# EAGLE board tiu_tracking_tag (EAGLE 5.11)
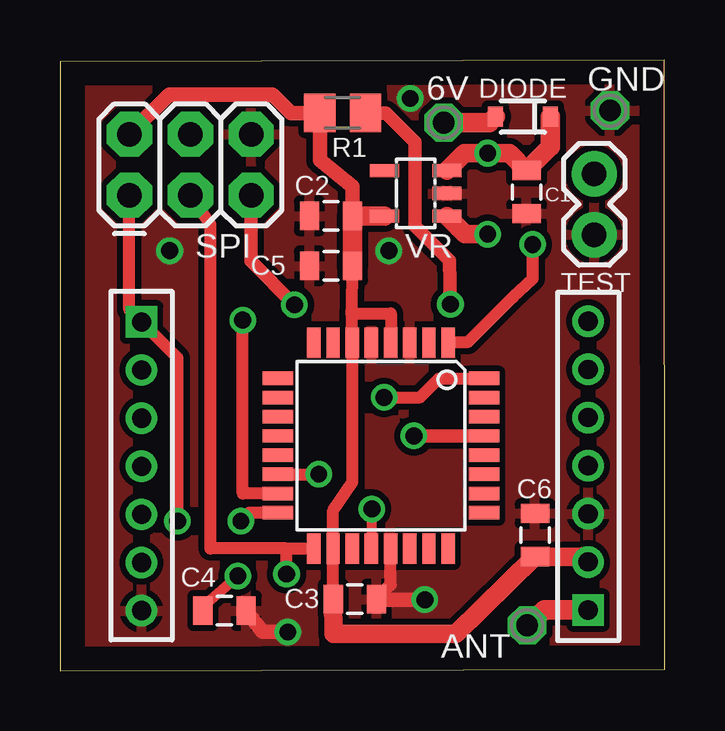
[diagram p0: board, top side]
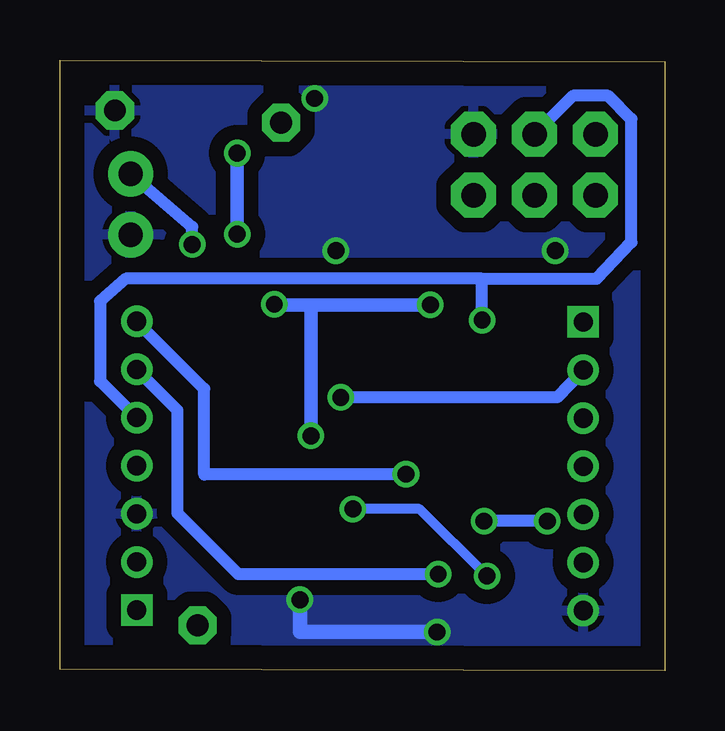
[diagram p1: board, bottom side, seen from below]

Size 25.22 x 25.48 mm. Coordinates in mm from the lower left corner, seen from the top.
Outline: 0,0 25.22,0.08 25.21,25.48 0.01,25.4 0,0
Copper layers (1*16): Top 0.035mm / dielectric 1.5mm / Bottom 0.035mm
Design rules "default": minimum track width 10mil, minimum drill 24mil, track to track 8mil, track to pad 8mil, pad to pad 8mil, via to via 8mil, smd to smd 8mil, copper to edge 40mil, drill to drill 8mil, minimum pad ring 10mil, minimum via ring 8mil, stop-mask expansion 4mil, vias tented up to drill 0mil, thermal gap 10mil
Net classes: 1 power: width 0.381 mm, clearance 0.254 mm

## Footprints (pad centres in the part's own frame; a part is rotated, then mirrored left to right if it is on the bottom)
1,6/0,8 = drill 0.9 pad 1.6 octagon: 1 0,0
0805 = smd 0.8 x 1.2: 1 -0.9,0; 2 0.9,0
SOD-323 = smd 0.63 x 0.83: 1 -1.15,0; 2 1.15,0
1X07 = drill 0.8 square: 1 0,0 | drill 0.8 round: 2 2.007,0; 3 4.013,0; 4 6.02,0; 5 8.026,0; 6 10.033,0; 7 12.04,0
M0805 = smd 1.3 x 1.6: 1 -0.95,0; 2 0.95,0
2X3 = drill 1.016 pad 1.88 octagon: 1 0,0; 2 0,2.54; 3 2.54,0; 4 2.54,2.54; 5 5.08,0; 6 5.08,2.54
1X02 = drill 1.016 pad 1.88 round: 1 0,0; 2 2.54,0
TQFP32-08 = smd 1.27 x 0.559: 1 -4.293,2.8; 2 -4.293,2; 3 -4.293,1.2; 4 -4.293,0.4; 5 -4.293,-0.4; 6 -4.293,-1.2; 7 -4.293,-2; 8 -4.293,-2.8; 17 4.293,-2.8; 18 4.293,-2; 19 4.293,-1.2; 20 4.293,-0.4; 21 4.293,0.4; 22 4.293,1.2; 23 4.293,2; 24 4.293,2.8 | smd 0.559 x 1.27: 9 -2.8,-4.293; 10 -2,-4.293; 11 -1.2,-4.293; 12 -0.4,-4.293; 13 0.4,-4.293; 14 1.2,-4.293; 15 2,-4.293; 16 2.8,-4.293; 25 2.8,4.293; 26 2,4.293; 27 1.2,4.293; 28 0.4,4.293; 29 -0.4,4.293; 30 -1.2,4.293; 31 -2,4.293; 32 -2.8,4.293
SOT23-5L = smd 0.55 x 1.2: 1 -0.95,-1.3; 2 0,-1.3; 3 0.95,-1.3; 4 0.95,1.3; 5 -0.95,1.3

## Placement (x,y rotation side)
6V  [1,6/0,8]  16,22.86 0 top
ANT  [1,6/0,8]  19.48,1.91 0 top
C1  1µ  [0805]  19.46,19.96 270 top
C2  1µ  [0805]  11.3,18.97 180 top
C3  0.1µ  [0805]  12.29,3 0 top
C4  0.1µ  [0805]  6.86,2.51 0 top
C5  0.1µ  [0805]  11.3,16.89 180 top
C6  0.1µ  [0805]  19.81,5.66 90 top
DIODE  [SOD-323]  19.3,23.11 180 top
GND  [1,6/0,8]  22.94,23.37 0 top
LEFT  [1X07]  3.4,14.55 270 top
R1  10k  [M0805]  11.79,23.27 180 top
RIGHT  [1X07]  22.02,2.54 90 top
SPI  AVR_SPI_PRG_6PTH  [2X3]  2.9,19.84 0 top
TEST  [1X02]  22.28,20.73 270 top
TQFP328  MEGA8-AI  [TQFP32-08]  13.39,9.4 270 top
VR  TPS769XX  [SOT23-5L]  14.83,19.91 90 top

## Library data of the parts
6V ANT GND = JeeLabs
C1-C6 DIODE SPI TEST = SparkFun
LEFT RIGHT = M7_02mm
R1 = resistor
TQFP328 = atmel
VR = tps769xx

## Nets
GND [power]: C1.2 C2.2 C3.2 C4.2 C5.2 C6.2 GND.1 LEFT.7 RIGHT.3 SPI.6 TEST.2 TQFP328.3 TQFP328.5 TQFP328.21 VR.2
IRQ: LEFT.2 TQFP328.32
N$1: C1.1 DIODE.1 VR.1 VR.3
N$2: 6V.1 DIODE.2
N$3: TEST.1 TQFP328.1
N$4: ANT.1 RIGHT.1
N$7: C4.1 TQFP328.20
N$16: R1.1 SPI.5 TQFP328.29
SCK: RIGHT.6 SPI.3 TQFP328.17
SDI: RIGHT.5 SPI.4 TQFP328.15
SDO: LEFT.1 SPI.1 TQFP328.16
SEL: RIGHT.7 TQFP328.14
VCC [power]: C2.1 C3.1 C5.1 C6.1 R1.2 RIGHT.2 SPI.2 TQFP328.4 TQFP328.6 TQFP328.18 VR.5

## Tracks (layer width: path | path; a pad name or v marks a point on that pad's centre or on a via)
GND  (via drill 0.7)
  Top 0.508: TQFP328.21 13.79,3.59 C3.2
  Top 0.61: C4.2 8.44,1.63 v9.5,1.63 | v15.21,2.97 13.19,2.97 C3.2
  Bottom 0.61: v9.5,1.63 15.21,1.63 v15.21,2.97
  other vias: 4.57,17.53 14.61,23.88 13.72,17.53
  pour Bottom (isolate 0.61): 0.03,25.4 25.22,25.45 25.22,0.05 0.03,0
  pour Top: 0,25.4 25.2,25.45 25.2,0.05 0,0
IRQ  (via drill 0.7)
  Top 0.508: TQFP328.32 15.8,12.19 15.01,11.41 v13.51,11.41
  Bottom 0.508: LEFT.2 4.5,11.41 v13.51,11.41
N$1  (via drill 0.7)
  Top 0.61: VR.3 16.26,20.86
  Top 0.762: VR.3 16.86,21.59 v17.83,21.59 18.73,21.59 C1.1 | v17.83,18.21 16.89,18.21 VR.1
  Top 0.813: DIODE.1 20.45,21.86 C1.1
  Bottom 0.559: v17.83,18.21 v17.83,21.59
N$2
  Top 0.813: 6V.1 17.9,22.86 DIODE.2
N$3  (via drill 0.7)
  Top 0.508: v19.71,17.78 19.71,16.35 18.89,15.59 17.02,13.72 16.21,13.72 TQFP328.1
  Bottom 0.508: TEST.1 19.71,18.52 v19.71,17.78
N$4
  Top 0.813: RIGHT.1 20.19,2.54 ANT.1
N$7  (via drill 0.7)
  Top 0.406: TQFP328.20 12.99,6.78 v13.01,6.76 | v7.42,3.96 5.96,2.67 C4.1
  Bottom 0.406: v13.01,6.76 10.24,6.76 v7.42,3.96
N$16  (via drill 0.7)
  Top 0.559: v14.76,9.8 TQFP328.29 | SPI.5 7.98,17.09 v9.78,15.27 | R1.1 13.59,23.27 14.81,22.05 14.81,18.54 16.23,17.12 v16.28,15.29
  Bottom 0.559: 14.73,9.8 v14.76,9.8 14.76,15.27 | 14.76,15.27 v9.78,15.27 | v16.28,15.29 16.26,15.27 14.76,15.27
SCK  (via drill 0.7)
  Top 0.508: SPI.3 6.27,18.62 6.27,5.11 9.45,5.11 | v9.45,4.04 9.45,5.11 | 9.45,5.11 TQFP328.17
  Bottom 0.508: RIGHT.6 20.32,10.87 20.32,6.58 17.78,4.04 v9.45,4.04
SDI  (via drill 0.7)
  Top 0.508: v7.62,14.63 7.62,7.4 TQFP328.15
  Bottom 0.508: SPI.4 3.83,23.98 2.36,23.98 1.4,23.01 1.4,17.88 2.85,16.36 7.62,16.36 | v7.62,14.63 7.62,16.36 | RIGHT.5 23.55,12.09 23.55,15.42 22.48,16.36 7.62,16.36
SDO  (via drill 0.7)
  Top 0.508: v4.9,6.25 4.9,13.06 LEFT.1 2.9,15.06 SPI.1 | TQFP328.16 7.9,6.6 v7.54,6.25
  Bottom 0.508: v4.9,6.25 v7.54,6.25
SEL  (via drill 0.7)
  Top 0.508: v10.79,8.2 10.69,8.2 TQFP328.14
  Bottom 0.508: RIGHT.7 19.2,11.76 19.2,8.2 | 19.2,8.2 19.2,8.18 | v10.79,8.2 19.2,8.2
VCC
  Top 0.406: 11.39,5.08 TQFP328.18
  Top 0.508: TQFP328.4 13.79,14.91 12.19,14.91 TQFP328.6 | 12.18,14.99 C5.1 | TQFP328.6 12.19,7.87 11.39,6.69 TQFP328.18 | C3.1 11.39,5.08
  Top 0.559: TQFP328.4 | 12.19,14.91 12.18,14.99 | VR.5 | TQFP328.6
  Top 0.61: SPI.2 4.55,24.03 8.87,24.03 9.63,23.27 R1.2 10.84,21.3 12.19,20.19 12.19,18.98 C2.1
  Top 0.762: C6.1 21.8,4.76 | 19.78,4.76 16.51,1.55 11.42,1.55 C3.1
  Top 0.813: VR.5 C2.1 C5.1 | 21.8,4.76 RIGHT.2 | 19.78,4.76 C6.1